# EAGLE board receiver (EAGLE 9.6.1)
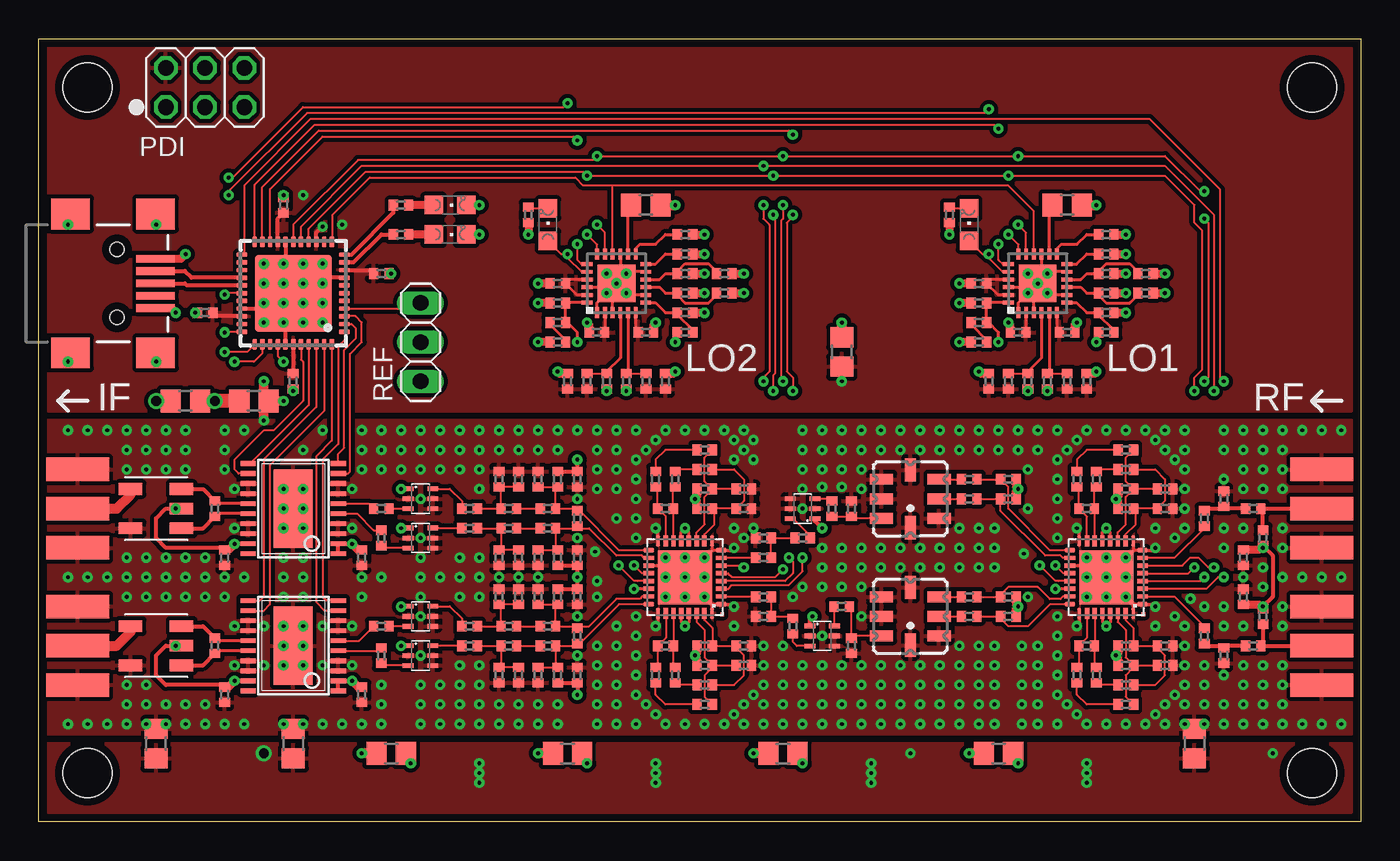
[diagram p0: board, top side]
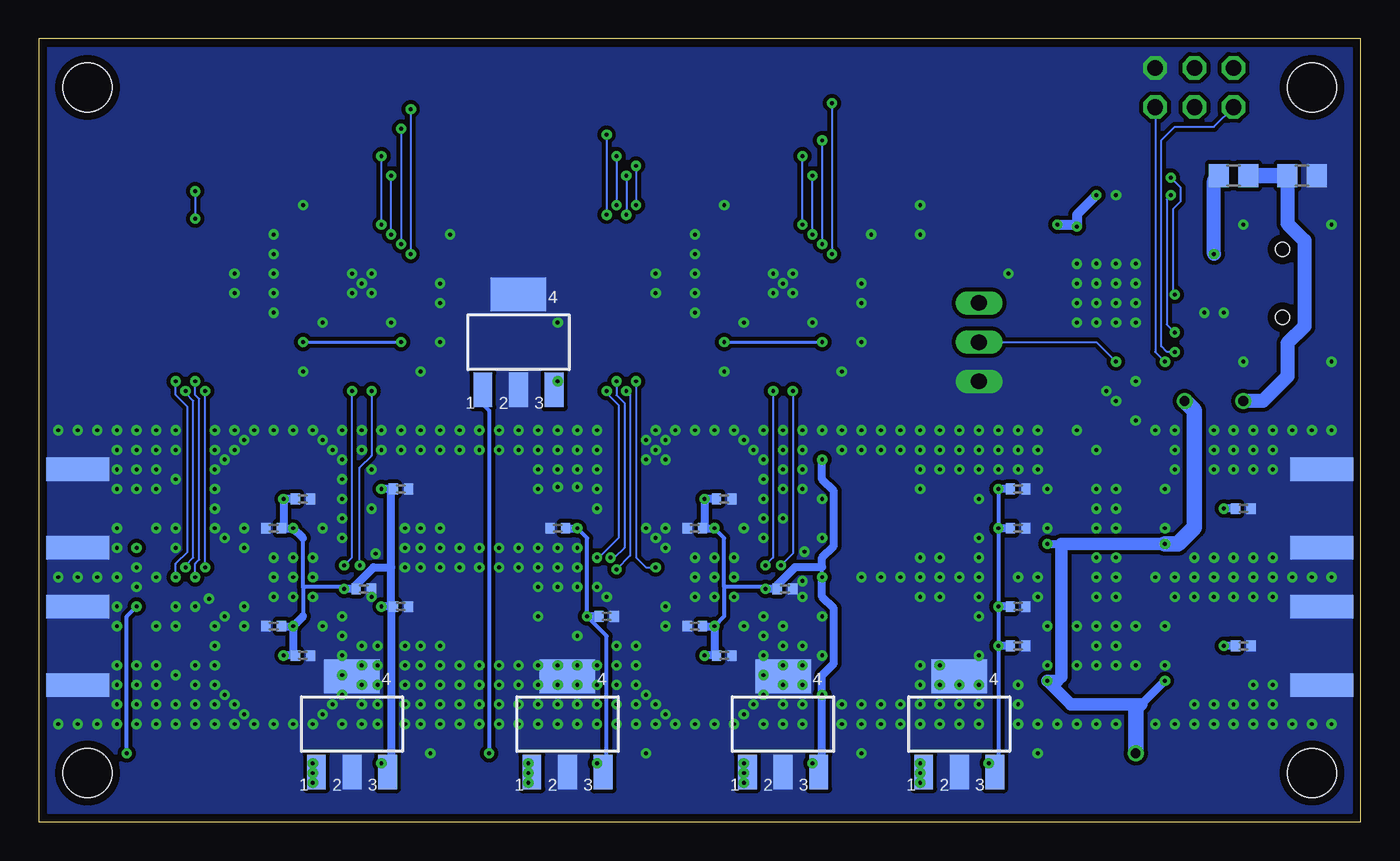
[diagram p1: board, bottom side, seen from below]

Size 85.72 x 50.8 mm. Coordinates in mm from the lower left corner, seen from the top.
Outline: 0,0 0,50.8 85.72,50.8 85.72,0 0,0
Copper layers (1*16): Top 0.035mm / dielectric 0.5mm / Bottom 0.035mm
Design rules "33each *": minimum track width 5mil, minimum drill 10mil, track to track 5mil, track to pad 5mil, pad to pad 5mil, via to via 5mil, smd to smd 5mil, copper to edge 20mil, drill to drill 8mil, minimum pad ring 10mil, minimum via ring 8mil, stop-mask expansion 4mil, vias tented up to drill 0mil, thermal gap 10mil
Holes 3.17 mm at 3.17,3.17 3.17,47.62 82.55,47.62 82.55,3.17

## Footprints (pad centres in the part's own frame; a part is rotated, then mirrored left to right if it is on the bottom)
R0402 = smd 0.6 x 0.7: 1 -0.5,0; 2 0.5,0
CHIPLED_0805 = smd 1.2 x 1.2: A 0,-1.05; C 0,1.05
R0805 = smd 1.3 x 1.5: 1 -0.95,0; 2 0.95,0
SOT363-INFINION = smd 0.3 x 0.7: 1 -0.65,-0.8; 2 0,-0.8; 3 0.65,-0.8; 4 0.65,0.8; 5 0,0.8; 6 -0.65,0.8
SOT223 = smd 1.219 x 2.235: 1 -2.311,-3.099; 2 0,-3.099; 3 2.311,-3.099 | smd 3.6 x 2.2: 4 0,3.099
TSSOP20 = smd 0.305 x 0.991: 1 -2.925,-2.918; 2 -2.275,-2.918; 3 -1.625,-2.918; 4 -0.975,-2.918; 5 -0.325,-2.918; 6 0.325,-2.918; 7 0.975,-2.918; 8 1.625,-2.918; 9 2.275,-2.918; 10 2.925,-2.918; 11 2.925,2.918; 12 2.275,2.918; 13 1.625,2.918; 14 0.975,2.918; 15 0.325,2.918; 16 -0.325,2.918; 17 -0.975,2.918; 18 -1.625,2.918; 19 -2.275,2.918; 20 -2.925,2.918
USB-MINIB = smd 2.5 x 0.5: D+ 2.5,0; D- 2.5,0.8; GND 2.5,-1.6; ID 2.5,-0.8; VBUS 2.5,1.6 | smd 2.5 x 2: S1 -3,4.5; S2 2.5,4.5; S3 -3,-4.5; S4 2.5,-4.5 | hole 0.9: 0,2.2; 0,-2.2
SMA-EDGE = smd 1.524 x 4.064: GND@0 0,0; GND@1 5.08,0; SIG 2.54,0 | smd 1.524 x 4.064 bottom: GND@2 0,0; GND@3 5.08,0
2X03 = drill 1.016 octagon: 1 -2.54,-1.27; 2 -2.54,1.27; 3 0,-1.27; 4 0,1.27; 5 2.54,-1.27; 6 2.54,1.27
1X03 = drill 1.016 long: 1 -2.54,0; 2 0,0; 3 2.54,0
RF_BALUN_2.54 = smd 0.762 x 1.524: 1 1.27,-1.651; 2 0,-1.651; 3 -1.27,-1.651; 4 -1.27,1.651; 6 1.27,1.651
HVQFN32 = smd 0.7 x 0.28: 1 -2.35,1.75; 2 -2.35,1.25; 3 -2.35,0.75; 4 -2.35,0.25; 5 -2.35,-0.25; 6 -2.35,-0.75; 7 -2.35,-1.25; 8 -2.35,-1.75; 17 2.35,-1.75; 18 2.35,-1.25; 19 2.35,-0.75; 20 2.35,-0.25; 21 2.35,0.25; 22 2.35,0.75; 23 2.35,1.25; 24 2.35,1.75 | smd 0.28 x 0.7: 9 -1.75,-2.35; 10 -1.25,-2.35; 11 -0.75,-2.35; 12 -0.25,-2.35; 13 0.25,-2.35; 14 0.75,-2.35; 15 1.25,-2.35; 16 1.75,-2.35; 25 1.75,2.35; 26 1.25,2.35; 27 0.75,2.35; 28 0.25,2.35; 29 -0.25,2.35; 30 -0.75,2.35; 31 -1.25,2.35; 32 -1.75,2.35 | smd 3.5 x 3.5: EXP 0,0 | smd 0.25 x 0.25: M1 -2.415,2.415
LCC8 = smd 1.5 x 0.7: 1 -1.867,1.27; 2 -1.867,0; 3 -1.867,-1.27; 5 1.867,-1.27; 6 1.867,0; 7 1.867,1.27 | smd 0.7 x 1.5: 4 0,-1.867; 8 0,1.867
SMD2,54-5,08 = smd 2.54 x 5.08: 1 0,0
QFN24-4X4 = smd 0.7 x 0.25: 1 -1.9,1.25; 2 -1.9,0.75; 3 -1.9,0.25; 4 -1.9,-0.25; 5 -1.9,-0.75; 6 -1.9,-1.25; 13 1.9,-1.25; 14 1.9,-0.75; 15 1.9,-0.25; 16 1.9,0.25; 17 1.9,0.75; 18 1.9,1.25 | smd 0.25 x 0.7: 7 -1.25,-1.9; 8 -0.75,-1.9; 9 -0.25,-1.9; 10 0.25,-1.9; 11 0.75,-1.9; 12 1.25,-1.9; 19 1.25,1.9; 20 0.75,1.9; 21 0.25,1.9; 22 -0.25,1.9; 23 -0.75,1.9; 24 -1.25,1.9 | smd 2.45 x 2.45: EXP 0,0
MLF44-TH = smd 0.7 x 0.3: 1 -3.325,2.5; 2 -3.325,2; 3 -3.325,1.5; 4 -3.325,1; 5 -3.325,0.5; 6 -3.325,0; 7 -3.325,-0.5; 8 -3.325,-1; 9 -3.325,-1.5; 10 -3.325,-2; 11 -3.325,-2.5; 23 3.325,-2.5; 24 3.325,-2; 25 3.325,-1.5; 26 3.325,-1; 27 3.325,-0.5; 28 3.325,0; 29 3.325,0.5; 30 3.325,1; 31 3.325,1.5; 32 3.325,2; 33 3.325,2.5 | smd 0.3 x 0.7: 12 -2.5,-3.325; 13 -2,-3.325; 14 -1.5,-3.325; 15 -1,-3.325; 16 -0.5,-3.325; 17 0,-3.325; 18 0.5,-3.325; 19 1,-3.325; 20 1.5,-3.325; 21 2,-3.325; 22 2.5,-3.325; 34 2.5,3.325; 35 2,3.325; 36 1.5,3.325; 37 1,3.325; 38 0.5,3.325; 39 0,3.325; 40 -0.5,3.325; 41 -1,3.325; 42 -1.5,3.325; 43 -2,3.325; 44 -2.5,3.325 | smd 5 x 5: TH 0,0

## Placement (x,y rotation side)
C1  3p  [R0402]  75.56,19.68 270 top
C2  3p  [R0402]  75.56,12.06 270 top
C3  [R0402]  70.48,11.43 0 top
C4  [R0402]  70.48,10.16 0 top
C5  [R0402]  70.48,20.32 0 top
C6  [R0402]  70.48,21.59 0 top
C7  [R0402]  73.03,21.59 0 top
C8  [R0402]  73.03,20.32 0 top
C9  [R0402]  73.03,11.43 0 top
C10  [R0402]  73.03,10.16 0 top
C11  [R0402]  67.94,11.43 0 top
C12  [R0402]  67.31,9.53 90 top
C13  [R0402]  68.58,9.53 90 top
C14  [R0402]  70.48,8.89 180 top
C15  [R0402]  70.48,7.62 180 top
C16  [R0402]  70.48,12.7 180 bottom
C17  [R0402]  68.58,10.79 0 bottom
C18  [R0402]  70.48,19.05 180 bottom
C19  [R0402]  68.58,20.95 0 bottom
C20  [R0402]  70.48,22.86 0 top
C21  [R0402]  70.48,24.13 0 top
C22  [R0402]  67.94,20.32 0 top
C23  [R0402]  67.31,22.23 90 top
C24  [R0402]  68.58,22.23 90 top
C25  [R0402]  64.64,15.11 0 bottom
C26  [R0402]  31.75,39.37 270 top
C27  [R0402]  59.05,39.37 270 top
C30  470p  [R0402]  60.33,20.95 180 top
C33  470p  [R0402]  60.33,22.23 180 top
C38  470p  [R0402]  60.33,14.61 0 top
C40  470p  [R0402]  60.33,13.34 0 top
C42  10n  [R0402]  62.23,13.97 0 bottom
C43  10n  [R0402]  62.23,21.59 0 bottom
C44  7p  [R0402]  51.44,20.32 90 top
C45  10n  [R0402]  49.53,18.41 180 top
C46  18p  [R0402]  46.99,17.14 180 top
C47  18p  [R0402]  46.99,14.61 0 top
C48  [R0402]  43.18,11.43 0 top
C49  [R0402]  43.18,10.16 0 top
C50  [R0402]  43.18,20.32 0 top
C51  [R0402]  43.18,21.59 0 top
C52  [R0402]  45.72,21.59 0 top
C53  [R0402]  45.72,20.32 0 top
C54  [R0402]  45.72,11.43 0 top
C55  [R0402]  45.72,10.16 0 top
C56  [R0402]  40.64,11.43 0 top
C57  [R0402]  40.01,9.53 90 top
C58  [R0402]  41.27,9.53 90 top
C59  [R0402]  43.18,8.89 180 top
C60  [R0402]  43.18,7.62 180 top
C61  [R0402]  43.18,12.7 180 bottom
C62  [R0402]  41.27,10.79 0 bottom
C63  [R0402]  43.18,19.05 180 bottom
C64  [R0402]  41.27,20.95 0 bottom
C65  [R0402]  43.18,22.86 0 top
C66  [R0402]  43.18,24.13 0 top
C67  [R0402]  40.64,20.32 0 top
C68  [R0402]  40.01,22.23 90 top
C69  [R0402]  41.27,22.23 90 top
C70  [R0402]  37.34,15.11 0 bottom
C71  100n  [R0402]  15.88,40.01 90 top
C72  100n  [R0402]  10.79,33.02 180 top
C73  100n  [R0402]  22.23,20.32 180 top
C74  100n  [R0402]  22.23,18.41 90 top
C75  100n  [R0402]  22.23,35.56 0 top
C76  100n  [R0402]  16.51,28.57 270 top
C77  10n  [R0402]  64.14,28.57 90 top
C78  10n  [R0402]  65.41,28.57 90 top
C79  22n  [R0402]  62.87,28.57 90 top
C80  22n  [R0402]  66.67,28.57 90 top
C81  10n  [R0402]  61.59,28.57 90 top
C82  10n  [R0402]  67.94,28.57 90 top
C83  10n  [R0402]  36.83,28.57 90 top
C84  10n  [R0402]  38.1,28.57 90 top
C85  22n  [R0402]  35.56,28.57 90 top
C86  22n  [R0402]  39.37,28.57 90 top
C87  10n  [R0402]  34.29,28.57 90 top
C88  10n  [R0402]  40.64,28.57 90 top
C89  100n  [R0402]  22.23,12.7 180 top
C90  100n  [R0402]  22.23,10.79 90 top
C91  [R0402]  29.84,17.14 90 top
C92  [R0402]  31.11,17.14 90 top
C93  [R0402]  30.48,19.05 180 top
C94  [R0402]  33.02,19.05 180 top
C95  [R0402]  32.38,17.14 90 top
C96  [R0402]  33.66,17.14 90 top
C97  [R0402]  30.48,20.32 180 top
C98  [R0402]  33.02,20.32 180 top
C99  [R0402]  29.84,22.23 90 top
C100  [R0402]  31.11,22.23 90 top
C101  [R0402]  32.38,22.23 90 top
C102  [R0402]  33.66,22.23 90 top
C103  100n  [R0402]  27.94,20.32 180 top
C104  100n  [R0402]  27.94,19.05 180 top
C105  [R0402]  29.84,9.53 90 top
C106  [R0402]  31.11,9.53 90 top
C107  [R0402]  30.48,11.43 180 top
C108  [R0402]  33.02,11.43 180 top
C109  [R0402]  32.38,9.53 90 top
C110  [R0402]  33.66,9.53 90 top
C111  [R0402]  30.48,12.7 180 top
C112  [R0402]  33.02,12.7 180 top
C113  [R0402]  29.84,14.61 90 top
C114  [R0402]  31.11,14.61 90 top
C115  [R0402]  32.38,14.61 90 top
C116  [R0402]  33.66,14.61 90 top
C117  100n  [R0402]  27.94,12.7 180 top
C118  100n  [R0402]  27.94,11.43 180 top
C119  [R0402]  34.92,17.14 90 top
C120  [R0402]  34.92,14.61 90 top
C121  [R0402]  34.92,9.53 90 top
C122  [R0402]  34.92,22.23 90 top
C123  100n  [R0402]  22.23,21.59 180 bottom
C124  100n  [R0402]  22.23,19.05 180 bottom
C125  100n  [R0402]  22.23,13.97 180 bottom
C126  100n  [R0402]  22.23,11.43 180 bottom
C127  7p  [R0402]  52.07,13.97 0 top
C128  10n  [R0402]  78.74,11.43 0 top
C129  100n  [R0402]  20.95,8.26 90 top
C130  100n  [R0402]  12.06,8.26 90 top
C131  100n  [R0402]  12.06,17.14 90 top
C132  1--n  [R0402]  20.95,17.14 90 top
C133  [R0402]  41.91,35.56 180 top
C134  [R0402]  41.91,34.29 180 top
C135  [R0402]  41.91,33.02 180 top
C136  [R0402]  41.91,36.83 180 top
C137  [R0402]  44.45,35.56 180 top
C138  [R0402]  44.45,34.29 180 top
C139  [R0402]  39.37,31.75 180 top
C140  [R0402]  36.2,31.75 180 top
C141  [R0402]  33.66,34.92 180 top
C142  [R0402]  41.91,31.75 180 top
C143  [R0402]  33.66,33.66 180 top
C144  [R0402]  33.66,32.38 180 top
C145  [R0402]  33.66,31.11 180 top
C146  [R0402]  69.22,35.56 180 top
C147  [R0402]  41.91,38.1 180 top
C148  [R0402]  69.22,34.29 180 top
C149  [R0402]  69.22,33.02 180 top
C150  [R0402]  69.22,36.83 180 top
C151  [R0402]  71.75,35.56 180 top
C152  [R0402]  71.75,34.29 180 top
C153  [R0402]  66.67,31.75 180 top
C154  [R0402]  63.5,31.75 180 top
C155  [R0402]  60.96,34.92 180 top
C156  [R0402]  69.22,31.75 180 top
C157  [R0402]  60.96,33.66 180 top
C158  [R0402]  60.96,32.38 180 top
C159  [R0402]  60.96,31.11 180 top
C160  [R0402]  69.22,38.1 180 top
C161  10n  [R0402]  78.74,20.32 0 top
C162  10n  [R0402]  78.11,14.61 270 top
C163  100n  [R0402]  7.62,20.32 0 bottom
C164  100n  [R0402]  7.62,11.43 0 bottom
C165  10n  [R0402]  78.11,17.14 270 top
D1  [CHIPLED_0805]  26.67,40.01 270 top
D2  [CHIPLED_0805]  26.67,38.1 270 top
E$1  1u  [R0805]  13.97,27.3 0 top
E$2  1u  [R0805]  9.53,27.3 180 top
E$3  1u  [R0805]  8.26,41.91 0 bottom
E$4  1u  [R0805]  3.81,41.91 180 bottom
E$5  [SOT363-INFINION]  50.8,12.06 270 top
E$6  [SOT363-INFINION]  49.53,20.32 90 top
E$7  [SOT223]  51.44,6.35 0 bottom
E$8  1u  [R0805]  48.26,4.45 180 top
E$9  [SOT363-INFINION]  24.77,20.95 270 top
E$10  [SOT363-INFINION]  24.77,18.41 270 top
E$11  [SOT363-INFINION]  24.77,13.34 270 top
E$12  [SOT363-INFINION]  24.77,10.79 270 top
E$13  [TSSOP20]  16.51,20.32 90 top
E$14  [TSSOP20]  16.51,11.43 90 top
E$19  [SOT223]  26.04,6.35 0 bottom
E$20  [SOT223]  37.47,6.35 0 bottom
E$23  1u  [R0805]  34.29,4.45 180 top
E$24  1u  [R0805]  22.86,4.45 180 top
E$25  1u  [R0805]  16.51,5.08 90 top
E$26  [SOT223]  65.41,6.35 0 bottom
E$27  1u  [R0805]  62.23,4.45 180 top
E$36  [R0805]  39.37,40.01 0 top
E$37  [R0805]  66.67,40.01 0 top
E$43  [SOT223]  54.61,31.11 0 bottom
E$44  1u  [R0805]  52.07,30.48 90 top
E$47  [CHIPLED_0805]  33.02,38.73 0 top
E$48  [CHIPLED_0805]  60.33,38.73 0 top
E$49  1u  [R0805]  7.62,5.08 90 top
E$50  1u  [R0805]  74.93,5.08 90 top
J1  [USB-MINIB]  5.08,34.92 0 top
J2  [SMA-EDGE]  2.54,17.78 90 top
J3  [SMA-EDGE]  2.54,8.89 90 top
J5  [SMA-EDGE]  83.19,8.89 90 top
J6  [SMA-EDGE]  83.19,17.78 90 top
L1  7.5n  [R0402]  76.83,20.95 90 top
L2  7.5n  [R0402]  76.83,10.79 270 top
L3  11n  [R0402]  46.99,18.41 180 top
L4  11n  [R0402]  46.99,13.34 180 top
L5  12n  [R0402]  52.7,11.43 270 top
L6  10n  [R0402]  48.9,12.7 90 top
L7  12n  [R0402]  52.7,20.32 90 top
L8  22n  [R0402]  79.38,18.41 270 top
L9  [R0402]  52.07,19.05 0 bottom
L10  [R0402]  48.9,13.34 180 bottom
L11  22n  [R0402]  79.38,13.34 270 top
L12  13n  [R0402]  62.87,14.61 0 top
L13  13n  [R0402]  62.87,13.34 0 top
L14  13n  [R0402]  62.87,20.95 0 top
L15  13n  [R0402]  62.87,22.23 0 top
PDI  [2X03]  10.79,47.62 0 top
R1  330  [R0402]  23.5,40.01 180 top
R2  330  [R0402]  23.5,38.1 180 top
R3  [R0402]  11.43,20.32 270 top
R4  [R0402]  11.43,11.43 270 top
R5  100  [R0402]  34.92,19.68 90 top
R6  100  [R0402]  34.92,12.06 90 top
REF  [1X03]  24.77,31.11 90 top
T1  [RF_BALUN_2.54]  7.62,20.32 90 top
T2  [RF_BALUN_2.54]  7.62,11.43 90 top
U1  LTC5566  [HVQFN32]  69.22,15.88 180 top
U2  AFS374E  [LCC8]  56.52,20.95 180 top
U3  AFS374E  [LCC8]  56.52,13.34 180 top
U4  LTC5566  [HVQFN32]  41.91,15.88 180 top
U5  [SMD2,54-5,08]  16.51,20.32 0 top
U6  [SMD2,54-5,08]  16.51,11.43 0 top
U7  [QFN24-4X4]  64.77,34.92 90 top
U8  [QFN24-4X4]  37.47,34.92 90 top
U9  [MLF44-TH]  16.51,34.29 180 top

## Library data of the parts
C1-C27 C30 C33 C38 C40 C42-C165 E$1-E$4 E$8 E$23-E$25 E$27 E$36 E$37 E$44 E$49 E$50 L1-L15 R1-R6 = rcl
D1 D2 E$47 E$48 = led
E$5 E$6 E$9-E$12 = transistor
E$7 E$19 E$20 E$26 E$43 = transistor-fet
E$13 E$14 U1 U4 = ref-packages
J1 = SparkFun-Connectors
J2 J3 J5 J6 = SparkFun-Retired
PDI REF = pinhead
T1 T2 = misc
U2 U3 = analog-devices
U5 U6 = wirepad
U7 U8 = linear-technology
U9 = atmel

## Nets
!RESET: PDI.5 U9.35
CLK: REF.2 U9.37
CLK_100K: U7.16 U8.16 U9.12
CS0: U8.19 U9.20
CS1: U4.3 U9.21
CS2: U7.19 U9.22
CS3: U1.3 U9.23
GND: C7.2 C8.2 C9.2 C10.2 C16.2 C17.2 C18.2 C19.2 C25.2 C26.2 C27.2 C42.2 C43.2 C52.2 C53.2 C54.2 C55.2 C61.2 C62.2 C63.2 C64.2 C70.2 C71.2 C72.2 C75.2 C76.2 C81.2 C82.2 C87.2 C88.2 C91.1 C92.1 C95.1 C99.2 C100.2 C101.2 C105.1 C106.1 C109.1 C113.2 C114.2 C115.2 C119.2 C120.1 C121.2 C122.1 C123.1 C124.1 C125.1 C126.1 C129.1 C130.1 C131.1 C132.1 C133.1 C134.1 C135.1 C136.1 C137.1 C138.1 C139.1 C140.2 C141.2 C143.2 C145.2 C146.1 C147.1 C148.1 C149.1 C150.1 C151.1 C152.1 C153.1 C154.2 C155.2 C157.2 C159.2 C160.1 C162.1 C163.2 C164.2 C165.2 D1.C D2.C E$1.2 E$4.1 E$5.2 E$5.4 E$5.5 E$6.2 E$6.4 E$6.5 E$7.2 E$7.4 E$8.2 E$9.2 E$9.4 E$9.5 E$10.2 E$10.4 E$10.5 E$11.2 E$11.4 E$11.5 E$12.2 E$12.4 E$12.5 E$13.3 E$13.4 E$13.7 E$13.8 E$13.13 E$13.14 E$13.17 E$13.18 E$14.3 E$14.4 E$14.7 E$14.8 E$14.13 E$14.14 E$14.17 E$14.18 E$19.2 E$19.4 E$20.2 E$20.4 E$23.2 E$24.2 E$25.2 E$26.2 E$26.4 E$27.2 E$36.2 E$37.2 E$43.2 E$43.4 E$44.2 E$49.2 E$50.2 J1.GND J1.S1 J1.S2 J1.S3 J1.S4 J2.GND@0 J2.GND@1 J2.GND@2 J2.GND@3 J3.GND@0 J3.GND@1 J3.GND@2 J3.GND@3 J5.GND@0 J5.GND@1 J5.GND@2 J5.GND@3 J6.GND@0 J6.GND@1 J6.GND@2 J6.GND@3 L1.2 L2.2 L3.2 L4.2 L5.2 L7.2 L9.1 L10.1 PDI.6 REF.1 T1.4 T2.4 U1.1 U1.8 U1.9 U1.16 U1.19 U1.25 U1.32 U1.EXP U2.1 U2.4 U2.5 U2.6 U2.8 U3.1 U3.4 U3.5 U3.6 U3.8 U4.1 U4.8 U4.9 U4.16 U4.19 U4.25 U4.32 U4.EXP U5.1 U6.1 U7.1 U7.3 U7.8 U7.11 U7.15 U7.22 U7.EXP U8.1 U8.3 U8.8 U8.11 U8.15 U8.22 U8.EXP U9.8 U9.18 U9.30 U9.38 U9.TH
IF1: J2.SIG T1.6
IF2: J3.SIG T2.6
LOCK0: E$47.A U8.20 U9.28
LOCK1: E$48.A U7.20 U9.33
PDI: PDI.1 U9.34
PPS: REF.3 U9.4
RF1: C161.2 J6.SIG L8.1
RF2: C128.2 J5.SIG L11.2
S$1: J1.D- U9.26
S$2: J1.D+ U9.27
S$3: C2.1 U1.2
S$4: C1.2 U1.7
S$5: C13.1 C14.2
S$6: C11.2 C13.2 U1.27
S$7: C6.2 C7.1 C21.2 U1.11
S$8: C5.2 C8.1 C20.2 U1.10
S$9: C4.2 C10.1 C15.1 U1.30
S$10: C3.2 C9.1 C14.1 U1.31
S$11: C11.1 C12.2 U1.26
S$12: C12.1 C15.2
S$13: C20.1 C24.2
S$14: C21.1 C23.2
S$15: C22.1 C23.1 U1.15
S$16: C22.2 C24.1 U1.14
S$17: C30.1 L14.1 U1.18
S$18: C38.1 U3.3
S$19: C77.2 C79.2 U7.4
S$21: C40.2 L13.1 U1.24
S$22: C38.2 L12.1 U1.23
S$25: C33.1 L15.1 U1.17
S$26: C78.2 C80.2 U7.5
S$27: R1.2 U9.11
S$28: R2.2 U9.10
S$29: C47.2 L4.1 L6.2
S$30: C45.2 C46.1 L3.1
S$31: C47.1 U4.2
S$32: C46.2 U4.7
S$33: C51.2 C52.1 C66.2 U4.11
S$34: C50.2 C53.1 C65.2 U4.10
S$35: C49.2 C55.1 C60.1 U4.30
S$36: C48.2 C54.1 C59.1 U4.31
S$37: C58.1 C59.2
S$38: C56.2 C58.2 U4.27
S$39: C56.1 C57.2 U4.26
S$40: C57.1 C60.2
S$41: C65.1 C69.2
S$42: C66.1 C68.2
S$43: C67.1 C68.1 U4.15
S$44: C67.2 C69.1 U4.14
S$45: C98.1 C101.1 C102.1 R5.2 U4.17
S$46: C94.1 C95.2 C96.2 R5.1 U4.18
S$47: C108.1 C109.2 C110.2 R6.1 U4.24
S$48: C112.1 C115.1 C116.1 R6.2 U4.23
S$50: C127.1 E$5.6
S$51: C73.2 E$13.6
S$52: C44.1 L7.1 U2.7
S$53: C127.2 L5.1 U3.7
S$54: C78.1 U1.20
S$55: C77.1 U1.21
S$56: C44.2 E$6.3
S$57: C133.2 C137.2 U8.10
S$58: C84.1 U4.20
S$59: C83.1 U4.21
S$60: C83.2 C85.2 U8.4
S$61: C84.2 C86.2 U8.5
S$62: C74.2 E$13.5
S$63: C73.1 E$9.3
S$64: C74.1 E$10.3
S$65: C89.1 E$11.3
S$66: C90.1 E$12.3
S$67: C89.2 E$14.6
S$68: C90.2 E$14.5
S$69: E$13.10 U9.2
S$70: C93.1 C94.2
S$71: C91.2 C92.2 C93.2 C104.1
S$72: C103.2 E$9.6
S$73: C97.1 C98.2
S$74: C97.2 C99.1 C100.1 C103.1
S$75: C104.2 E$10.6
S$76: C107.1 C108.2
S$77: C105.2 C106.2 C107.2 C118.1
S$78: C117.2 E$11.6
S$79: C111.1 C112.2
S$80: C111.2 C113.1 C114.1 C117.1
S$81: C118.2 E$12.6
S$82: E$13.9 U9.3
S$83: E$14.10 U9.1
S$84: E$14.9 U9.44
S$85: E$14.12 U9.43
S$86: E$14.11 U9.42
S$89: C134.2 C138.2 U8.9
S$90: C136.2 U8.12
S$91: C135.2 C142.1 U8.7
S$92: C142.2 C143.1 C144.1 U8.24
S$93: C144.2 C145.1
S$94: C147.2 U8.13
S$95: E$36.1 U8.14
S$96: E$5.3 L6.1
S$97: C45.1 E$6.6
S$98: C146.2 C151.2 U7.10
S$99: C148.2 C152.2 U7.9
S$100: C150.2 U7.12
S$101: C149.2 C156.1 U7.7
S$102: C156.2 C157.1 C158.1 U7.24
S$103: C158.2 C159.1
S$104: C160.2 U7.13
S$105: E$37.1 U7.14
S$106: D1.A R1.1
S$107: C26.1 E$47.C
S$108: C27.1 E$48.C
S$109: D2.A R2.1
S$110: E$13.12 U9.40
S$111: E$13.16 R3.2 T1.3
S$112: E$13.15 R3.1 T1.1
S$113: E$14.15 R4.1 T2.1
S$114: E$14.16 R4.2 T2.3
S$115: E$13.11 U9.41
S$116: C1.1 C161.1 L1.1
S$117: C2.2 C128.1 L2.1
S$121: C40.1 U3.2
S$122: C30.2 U2.2
S$123: C33.2 U2.3
SPI_CLK: U1.4 U4.4 U7.17 U8.17 U9.17
SPI_SDI: U1.5 U4.5 U7.18 U8.18 U9.15
SPI_SDO: U1.6 U4.6 U9.16
V2.5_1: C123.2 C124.2 C125.2 C126.2 E$9.1 E$10.1 E$11.1 E$12.1 E$19.3 E$24.1
V2.5_2: E$5.1 E$6.1 E$7.3 E$8.1 L9.2 L10.2
V3.3: C71.1 C72.1 C75.1 C76.1 C79.1 C80.1 C81.1 C82.1 C85.1 C86.1 C87.1 C88.1 C139.2 C140.1 C141.1 C153.2 C154.1 C155.1 E$43.3 E$44.1 PDI.2 U7.2 U7.6 U7.21 U7.23 U8.2 U8.6 U8.21 U8.23 U9.9 U9.14 U9.19 U9.31 U9.39
V3.3_1: C48.1 C49.1 C50.1 C51.1 C61.1 C62.1 C63.1 C64.1 C70.1 C96.1 C102.2 C110.1 C116.2 C119.1 C120.2 C121.1 C122.2 E$20.3 E$23.1 U4.12 U4.13 U4.22 U4.28 U4.29
V3.3_2: C3.1 C4.1 C5.1 C6.1 C16.1 C17.1 C18.1 C19.1 C25.1 C42.1 C43.1 E$26.3 E$27.1 L12.2 L13.2 L14.2 L15.2 U1.12 U1.13 U1.22 U1.28 U1.29
V5: C129.2 C130.2 C131.2 C132.2 C162.2 C163.1 C164.1 C165.1 E$1.1 E$2.1 E$7.1 E$13.1 E$13.2 E$13.19 E$14.1 E$14.2 E$14.19 E$19.1 E$20.1 E$25.1 E$26.1 E$43.1 E$49.1 E$50.1 L8.2 L11.1 T1.2 T2.2
VBUS: E$3.1 J1.VBUS
VIN: E$2.2 E$3.2 E$4.2

## Tracks (layer width: path | path; a pad name or v marks a point on that pad's centre or on a via)
!RESET  (via drill 0.25)
  Top 0.127: U9.35 14.51,30.39 13.97,29.84 v12.7,29.84
  Bottom 0.127: v12.7,29.84 13.34,30.48 PDI.5
CLK  (via drill 0.25)
  Top 0.127: U9.37 15.51,30.21 v15.88,29.84
  Bottom 0.127: v15.88,29.84 17.14,31.11 REF.2
CLK_100K
  Top 0.127: U8.16 37.22,41.27 37.21,41.27 | U7.16 64.52,39.62 62.87,41.27 37.21,41.27 | 37.21,41.27 35.31,41.27 34.8,41.78 21.46,41.78 19.05,39.37 19.05,37.66 U9.12
CS0  (via drill 0.25)
  Top 0.127: v34.92,44.2 34.67,44.45 18.41,44.45 15.01,41.05 U9.20 | U8.19 35.2,36.17 34.92,36.45 v34.92,37.47
  Bottom 0.127: v34.92,44.2 v34.92,37.47
CS1  (via drill 0.25)
  Top 0.127: v48.9,44.58 48.64,44.83 18.16,44.83 14.51,41.18 U9.21 | U4.3 44.72,15.12 44.96,15.37 48.64,15.37 49.53,16.26 v49.53,17.14 | v48.9,39.37 48.9,39.24 48.51,38.86 48.51,29.21 48.9,28.83 v48.9,27.94
  Bottom 0.127: v48.9,27.94 48.9,27.81 48.13,27.05 48.13,18.41 49.4,17.14 v49.53,17.14 | v48.9,44.58 v48.9,39.37
CS2  (via drill 0.25)
  Top 0.127: U7.19 62.5,36.17 62.23,36.45 v62.23,37.47 | v62.23,44.96 61.98,45.21 17.91,45.21 14.01,41.31 U9.22
  Bottom 0.127: v62.23,44.96 v62.23,37.47
CS3  (via drill 0.25)
  Top 0.127: v76.83,15.88 76.45,15.88 75.7,15.12 U1.3 | v76.83,28.57 76.58,28.83 76.58,41.02 72.01,45.59 17.65,45.59 13.34,41.27 13.34,36.94 U9.23
  Bottom 0.127: v76.83,15.88 76.83,16.76 76.07,17.53 76.07,26.92 76.83,27.69 v76.83,28.57
GND  (via drill 0.25)
  Top 0.203: v72.39,17.78 72.23,17.62 U1.8 70.97,17.62 | v72.39,13.97 72.23,14.12 U1.1 70.97,14.12 | U1.9 70.97,17.62 | 70.97,17.62 v70.48,17.14 | U1.32 70.97,14.12 | 70.97,14.12 v70.48,14.61 | U1.19 67.83,16.62 67.94,16.51 v67.94,15.88 | U1.16 67.47,18.89 v67.31,19.05 | U1.25 67.47,12.86 v67.31,12.7 | v45.09,17.78 44.93,17.62 U4.8 43.66,17.62 | v45.09,13.97 44.93,14.12 U4.1 43.66,14.12 | U4.9 43.66,17.62 | 43.66,17.62 v43.18,17.14 | U4.32 43.66,14.12 | 43.66,14.12 v43.18,14.61 | U4.19 40.52,16.62 40.64,16.51 v40.64,15.88 | U4.16 40.16,18.89 v40.01,19.05 | U4.25 40.16,12.86 v40.01,12.7 | U8.22 36.45,34.67 v36.83,34.29 | U8.3 37.22,33.91 v36.83,34.29 | U8.8 38.22,34.17 v38.1,34.29 | U8.11 38.22,35.67 v38.1,35.56 37.72,35.95 U8.15 | U8.1 36.22,33.67 v36.83,34.29 | U7.22 63.75,34.67 v64.14,34.29 | U7.3 64.52,33.91 v64.14,34.29 | U7.8 65.52,34.17 v65.41,34.29 | U7.11 65.52,35.67 v65.41,35.56 65.02,35.95 U7.15 | U7.1 63.52,33.67 v64.14,34.29
  Top 0.254: U9.8 18.78,35.29 v18.41,34.92 | U9.38 16.01,32.25 v15.88,32.38 | U9.30 14.24,33.29 v14.61,33.66 | U9.18 16.01,36.33 v15.88,36.2 | U9.TH v15.88,34.92
  Top 0.508: C71.2 v15.88,40.64 | C75.2 v22.86,35.56 | C76.2 v16.51,27.94 | C72.2 v10.16,33.02 | C133.1 v43.18,35.56 | C134.1 v43.18,34.29 | C136.1 v43.18,36.83 | C135.1 v43.18,33.02 | C138.1 v45.72,34.29 | C137.1 v45.72,35.56 | C145.2 v32.38,31.11 | C143.2 v32.38,33.66 | C141.2 v32.38,34.92 | C139.1 39.87,32.25 v40.01,32.38 | C140.2 35.7,32.25 v35.56,32.38 | C147.1 v43.18,38.1 | C146.1 v70.48,35.56 | C148.1 v70.48,34.29 | C150.1 v70.48,36.83 | C149.1 v70.48,33.02 | C152.1 v73.03,34.29 | C151.1 v73.03,35.56 | C159.2 v59.69,31.11 | C157.2 v59.69,33.66 | C155.2 v59.69,34.92 | C153.1 67.17,32.25 v67.31,32.38 | C154.2 63,32.25 v62.87,32.38 | C160.1 v70.48,38.1 | C87.2 33.79,29.07 v33.66,29.21 | C88.2 41.14,29.07 v41.27,29.21 | C81.2 61.09,29.07 v60.96,29.21 | C82.2 68.44,29.07 v68.58,29.21 | C26.2 v31.75,38.1 | C27.2 v59.05,38.1 | J1.GND 8.59,33.33 v8.89,33.02 | v28.57,40.01 D1.C | D2.C v28.57,38.1
  Top 0.61: J1.S3 2.08,30.02 v1.91,29.84 | E$1.2 14.61,27.62 v14.61,28.57 | E$1.2 14.61,26.99 v14.61,26.04 | E$1.2 v15.88,27.3
  Top 0.635: E$24.2 v20.95,4.45 | E$23.2 v32.38,4.45 | E$8.2 v46.35,4.45 | E$27.2 v60.33,4.45 | E$36.2 v41.27,40.01 | E$37.2 v68.58,40.01 | E$44.2 v52.07,32.38 | v1.91,38.73 1.91,39.25 J1.S1 | J1.S2 7.62,39.38 v7.62,38.73 | v7.62,29.84 7.58,29.89 J1.S4
  other vias: 76.83,9.53 73.66,18.41 74.3,19.05 74.3,20.32 74.3,21.59 76.83,12.7 80.64,13.97 80.64,8.89 80.64,22.86 73.66,13.34 74.3,12.7 74.3,11.43 74.3,10.16 75.56,10.16 72.39,19.05 72.39,12.7 67.94,17.14 69.22,17.14 70.48,15.88 69.22,15.88 67.94,14.61 69.22,14.61 74.3,8.89 73.66,8.26 73.03,7.62 71.75,6.35 70.48,6.35 72.39,6.99 69.22,6.35 67.94,6.35 67.31,6.99 66.67,7.62 66.04,8.26 66.04,9.53 66.04,10.79 66.04,12.06 73.03,6.35 74.3,6.35 75.56,6.35 76.83,6.35 80.64,6.35 81.92,6.35 83.19,6.35 74.3,22.86 73.66,23.5 73.03,24.13 72.39,24.77 71.75,25.4 70.48,25.4 69.22,25.4 67.94,25.4 67.31,24.77 66.67,24.13 66.04,23.5 66.04,22.23 66.04,20.95 66.04,19.68 73.03,25.4 74.3,25.4 80.64,25.4 81.92,25.4 83.19,25.4 66.04,18.41 66.04,13.34 64.77,11.43 54.61,24.13 54.61,17.78 54.61,10.16 54.61,16.51 55.88,17.78 57.15,17.78 57.15,16.51 55.88,16.51 53.34,17.78 53.34,16.51 55.88,24.13 55.88,25.4 54.61,25.4 57.15,25.4 57.15,24.13 58.42,24.13 58.42,25.4 59.69,25.4 60.96,25.4 62.23,25.4 62.23,24.13 60.96,24.13 59.69,24.13 53.34,25.4 53.34,24.13 52.07,25.4 52.07,24.13 66.04,25.4 66.04,6.35 64.77,6.35 60.96,6.35 59.69,6.35 52.07,6.35 52.07,7.62 52.07,8.89 52.07,10.16 53.34,10.16 53.34,8.89 53.34,7.62 53.34,6.35 54.61,8.89 54.61,7.62 54.61,6.35 55.88,10.16 55.88,8.89 55.88,7.62 55.88,6.35 57.15,10.16 57.15,8.89 57.15,7.62 57.15,6.35 58.42,10.16 59.69,10.16 60.96,10.16 64.77,7.62 64.77,8.89 64.77,10.16 58.42,6.35 58.42,7.62 58.42,8.89 59.69,8.89 59.69,7.62 60.96,8.89 60.96,7.62 64.77,24.13 64.77,25.4 74.3,7.62 75.56,7.62 75.56,8.89 76.83,7.62 74.3,24.13 49.53,8.89 46.99,11.43 46.99,10.16 45.09,19.05 45.09,12.7 40.64,17.14 41.91,17.14 43.18,15.88 41.91,15.88 40.64,14.61 41.91,14.61 46.99,8.89 46.35,8.26 45.72,7.62 44.45,6.35 43.18,6.35 45.09,6.99 41.91,6.35 40.64,6.35 40.01,6.99 39.37,7.62 38.73,8.26 38.73,9.53 38.73,10.79 38.73,12.06 45.72,6.35 46.99,6.35 48.26,6.35 49.53,6.35 46.35,23.5 45.72,24.13 45.09,24.77 44.45,25.4 43.18,25.4 41.91,25.4 40.64,25.4 40.01,24.77 39.37,24.13 38.73,23.5 38.73,22.23 38.73,20.95 38.73,19.68 45.72,25.4 49.53,25.4 38.73,18.41 38.73,13.34 37.47,11.43 37.47,19.68 38.73,25.4 38.73,6.35 37.47,6.35 37.47,7.62 37.47,8.89 37.47,10.16 37.47,21.59 37.47,22.86 37.47,24.13 37.47,25.4 46.99,7.62 48.26,7.62 48.26,8.89 49.53,7.62 50.8,10.16 50.8,8.89 50.8,7.62 49.53,10.16 50.8,25.4 45.72,18.41 50.8,6.35 81.92,15.88 83.19,15.88 84.45,15.88 29.84,15.88 31.11,15.88 32.38,15.88 29.84,24.13 31.11,24.13 32.38,24.13 29.84,7.62 31.11,7.62 32.38,7.62 34.92,10.79 34.92,13.34 34.92,18.41 34.92,20.95 36.2,14.61 36.2,8.89 36.2,7.62 36.2,6.35 37.47,12.7 36.2,25.4 36.2,24.13 36.2,22.86 36.2,21.59 24.77,20.95 24.77,18.41 24.77,13.34 24.77,10.79 20.32,12.7 20.32,10.16 12.7,12.7 12.7,10.16 20.32,21.59 20.32,19.05 12.7,19.05 12.7,21.59 15.88,20.32 15.88,21.59 17.14,21.59 17.14,20.32 17.14,19.05 15.88,19.05 15.88,12.7 17.14,12.7 15.88,11.43 15.88,10.16 17.14,10.16 17.14,11.43 33.66,25.4 33.66,24.13 32.38,25.4 31.11,25.4 29.84,25.4 28.57,25.4 27.3,25.4 33.66,7.62 33.66,6.35 32.38,6.35 31.11,6.35 29.84,6.35 28.57,6.35 27.3,6.35 26.04,6.35 24.77,6.35 24.77,8.89 26.04,8.89 27.3,8.89 27.3,10.16 28.57,10.16 28.57,8.89 24.77,7.62 26.04,7.62 27.3,7.62 28.57,7.62 26.04,25.4 24.77,25.4 24.77,22.86 26.04,22.86 27.3,22.86 28.57,22.86 28.57,21.59 28.57,24.13 27.3,24.13 26.04,24.13 24.77,24.13 28.57,15.88 28.57,14.61 27.3,14.61 27.3,15.88 27.3,17.14 28.57,17.14 26.04,15.88 24.77,15.88 24.77,14.61 24.77,17.14 14.61,12.7 14.61,10.16 18.41,12.7 18.41,10.16 12.06,15.88 20.95,15.88 12.06,6.35 20.95,6.35 34.92,25.4 36.2,10.16 36.2,11.43 63.5,25.4 63.5,24.13 23.5,25.4 23.5,24.13 23.5,22.86 36.07,17.53 36.2,15.62 61.98,10.16 61.98,8.89 61.98,7.62 61.98,6.35 63.75,10.16 63.75,8.89 63.75,7.62 63.75,6.35 18.41,32.38 17.14,32.38 14.61,32.38 18.41,33.66 18.41,36.2 17.14,36.2 17.14,34.92 17.14,33.66 15.88,33.66 14.61,36.2 14.61,34.92 15.88,15.88 15.88,17.14 17.14,17.14 17.14,15.88 17.14,14.61 15.88,14.61 36.83,35.56 37.47,34.92 64.14,35.56 64.77,34.92 46.35,24.77 45.09,23.5 74.68,14.48 75.56,13.97 76.83,13.97 76.83,17.78 76.83,19.05 76.83,22.23 76.83,25.4 76.83,24.13 22.23,6.35 19.68,6.35 18.41,6.35 17.14,6.35 15.88,6.35 13.34,6.35 10.79,6.35 9.53,6.35 9.53,7.62 8.26,7.62 6.99,7.62 5.71,7.62 5.71,6.35 4.45,6.35 3.17,6.35 1.91,6.35 22.23,25.4 20.95,25.4 22.23,24.13 22.23,22.86 20.95,24.13 20.95,22.86 6.99,6.35 8.26,6.35 10.79,7.62 22.23,7.62 22.23,8.89 3.17,25.4 4.45,25.4 5.71,25.4 6.99,25.4 8.26,25.4 9.53,25.4 12.06,25.4 12.06,24.13 9.53,24.13 8.26,24.13 6.99,24.13 5.71,24.13 22.23,15.88 20.95,14.61 13.34,15.88 12.06,14.61 10.79,14.61 9.53,14.61 8.26,14.61 6.99,14.61 5.71,14.61 10.79,15.88 9.53,15.88 8.26,15.88 6.99,15.88 5.71,15.88 4.45,15.88 3.17,15.88 1.91,15.88 10.79,17.14 9.53,17.14 8.26,17.14 6.99,17.14 5.71,17.14 5.71,22.86 6.99,22.86 8.26,22.86 9.53,22.86 12.06,22.86 5.71,8.89 6.99,8.89 13.34,25.4 17.14,24.13 18.41,25.4 48.26,10.16 50.8,17.78 46.35,19.05 1.91,25.4 78.11,25.4 79.38,25.4 78.11,6.35 79.38,6.35 84.45,25.4 84.45,6.35 78.11,24.13 79.38,24.13 80.64,24.13 78.11,7.62 79.38,7.62 80.64,7.62 80.64,15.88 78.11,15.88 78.11,8.89 78.11,10.16 79.38,10.16 79.38,8.89 80.64,10.16 79.38,22.86 79.38,21.59 80.64,21.59 78.11,22.86 78.11,21.59 78.11,19.05 78.11,12.7 80.64,19.05 80.64,17.78 80.64,12.7 79.38,15.24 79.38,16.51 64.14,14.61 58.42,17.78 59.69,17.78 60.96,17.78 60.96,16.51 59.69,16.51 58.42,16.51 59.69,19.05 60.96,19.05 59.69,11.43 60.96,11.43 61.98,11.43 63.88,17.4 64.14,20.32 64.14,22.86 53.34,15.24 53.34,13.34 50.8,12.06 48.26,11.43 52.07,15.24 50.8,15.24 49.53,15.24 48.9,14.61 50.8,16.51 52.07,16.51 52.07,17.78 49.53,20.32 50.8,24.13 49.53,24.13 49.53,22.86 49.53,21.59 50.8,22.86 52.07,22.86 53.34,22.86 53.34,21.59 52.07,21.72 50.8,21.72 61.98,19.05 61.98,17.78 61.98,16.51 63.75,11.43
  pour Top (isolate 0.254): 0.64,26.04 85.09,26.04 85.09,5.71 0.64,5.71
  pour Bottom (isolate 0.254, no thermals): 0.64,50.16 0.64,0.64 85.09,0.64 85.09,50.16
IF1
  Top 0.635: J2.SIG 5.08,20.32 5.97,21.21 T1.6
IF2
  Top 0.635: J3.SIG 5.08,11.43 5.97,12.32 T2.6
LOCK0  (via drill 0.25)
  Top 0.127: U8.20 35.19,35.67 34.29,36.58 v34.29,36.83 33.88,36.83 E$47.A | v34.29,46.61 34.04,46.35 17.14,46.35 12.57,41.78 v12.32,41.78 | U9.28 12.15,34.29 v12.06,34.21
  Bottom 0.127: v34.29,46.61 v34.29,36.83 | v12.32,41.78 11.68,41.15 11.68,40.26 12.19,39.75 12.19,34.33 v12.06,34.21
LOCK1  (via drill 0.25)
  Top 0.127: v61.59,46.23 61.34,45.97 17.4,45.97 12.32,40.89 v12.32,40.64 | U7.20 62.5,35.67 61.59,36.58 v61.59,36.83 61.18,36.83 E$48.A | v12.06,31.75 12.11,31.79 U9.33
  Bottom 0.127: v61.59,46.23 v61.59,36.83 | v12.32,40.64 12.59,40.37 12.59,32.27 v12.06,31.75
PDI  (via drill 0.25)
  Top 0.127: U9.34 13.53,30.48 v12.06,30.48
  Bottom 0.127: PDI.1 9.53,45.09 12.06,45.09 12.95,44.2 12.95,30.86 12.57,30.48 v12.06,30.48
PPS
  Top 0.127: U9.4 24.4,33.29 REF.3
RF1
  Top 0.254: C161.2 79.38,20.32 | 79.38,20.32 J6.SIG | L8.1 79.38,20.32
RF2
  Top 0.254: C128.2 79.38,11.43 | 79.38,11.43 J5.SIG | L11.2 79.38,11.43
S$1
  Top 0.254: J1.D- 9.48,35.73 9.92,35.29 U9.26
S$2
  Top 0.254: J1.D+ 9.48,34.92 9.62,34.79 U9.27
S$3
  Top 0.127: U1.2 73.64,14.62 75.56,12.7 C2.1
S$4
  Top 0.127: U1.7 73.64,17.12 75.56,19.05 C1.2
S$5
  Top 0.127: C14.2 68.72,8.89 C13.1
S$6
  Top 0.127: C13.2 68.44,10.16 C11.2 68.47,11.45 U1.27
S$7
  Top 0.127: C7.1 C6.2 | U1.11 69.97,18.78 70.48,19.3 70.48,21.09 C6.2 | C6.2 70.48,22.09 70.48,23.63 C21.2
S$8
  Top 0.127: 71.12,20.32 C8.1 73.03,20.82 73.03,22.23 72.39,22.86 C20.2 | 71.12,20.32 C5.2 | U1.10 70.47,18.65 71.12,19.3 71.12,20.32
S$9
  Top 0.127: U1.30 69.97,12.97 70.48,12.45 70.48,10.66 C4.2 | C4.2 C10.1 | C4.2 70.98,10.03 70.48,9.53 70.48,8.12 C15.1
S$10
  Top 0.127: 72.39,11.43 C3.2 70.98,12.58 70.47,13.1 U1.31 | 72.39,11.43 C9.1 | C14.1 72.39,8.89 73.03,9.53 73.03,10.79 72.39,11.43
S$11
  Top 0.127: C12.2 67.44,10.16 C11.1 67.97,11.95 U1.26
S$12
  Top 0.127: C15.2 67.94,7.62 67.31,8.26 C12.1
S$13
  Top 0.127: C20.1 68.72,22.86 C24.2
S$14
  Top 0.127: C21.1 67.94,24.13 67.31,23.5 C23.2
S$15
  Top 0.127: U1.15 67.97,19.8 C22.1 67.44,21.59 C23.1
S$16
  Top 0.127: U1.14 68.47,20.3 C22.2 68.44,21.59 C24.1
S$17
  Top 0.127: 60.83,21.09 C30.1 L14.1 62.37,20.18 65.27,17.29 66.26,17.29 66.42,17.12 U1.18 66.57,17.12
S$18
  Top 0.127: U3.3 C38.1
S$19
  Top 0.127: C79.2 C77.2
  Top 0.203: U7.4 65.02,30.09 64.14,29.21 C77.2
S$21
  Top 0.127: C40.2 L13.1 62.37,13.2 62.87,12.7 64.14,12.7 65.56,14.12 U1.24
S$22
  Top 0.127: 60.83,14.47 C38.2 L12.1 62.37,14.74 62.87,15.24 64.77,15.24 65.55,14.46 66.26,14.46 66.42,14.62 U1.23
S$25
  Top 0.127: C33.1 L15.1 62.87,21.73 62.87,20.32 65.56,17.62 U1.17
S$26
  Top 0.127: C78.2 C80.2
  Top 0.203: U7.5 65.52,29.19 C78.2
S$27
  Top 0.254: U9.11 20.28,36.79 23,39.51 R1.2
S$28
  Top 0.254: U9.10 20.41,36.29 22.23,38.1 R2.2
S$29
  Top 0.127: C47.2 L4.1 48.76,13.34 L6.2
S$30
  Top 0.127: C46.1 L3.1 C45.2
S$31
  Top 0.127: U4.2 46.47,14.62 C47.1
S$32
  Top 0.127: U4.7 44.28,17.14 C46.2
S$33
  Top 0.127: C52.1 C51.2 | U4.11 42.66,18.78 43.18,19.3 43.18,21.09 C51.2 | C51.2 43.18,22.09 43.18,23.63 C66.2
S$34
  Top 0.127: 43.81,20.32 C53.1 45.72,20.82 45.72,22.23 45.09,22.86 C65.2 | 43.81,20.32 C50.2 | U4.10 43.16,18.65 43.81,19.3 43.81,20.32
S$35
  Top 0.127: U4.30 42.66,12.97 43.18,12.45 43.18,10.66 C49.2 | C49.2 C55.1 | C49.2 43.68,10.03 43.18,9.53 43.18,8.12 C60.1
S$36
  Top 0.127: 45.09,11.43 C48.2 43.68,12.58 43.16,13.1 U4.31 | 45.09,11.43 C54.1 | C59.1 45.09,8.89 45.72,9.53 45.72,10.79 45.09,11.43
S$37
  Top 0.127: C59.2 41.41,8.89 C58.1
S$38
  Top 0.127: C58.2 41.14,10.16 C56.2 41.16,11.45 U4.27
S$39
  Top 0.127: C57.2 40.14,10.16 C56.1 40.66,11.95 U4.26
S$40
  Top 0.127: C60.2 40.64,7.62 40.01,8.26 C57.1
S$41
  Top 0.127: C65.1 41.41,22.86 C69.2
S$42
  Top 0.127: C66.1 40.64,24.13 40.01,23.5 C68.2
S$43
  Top 0.127: U4.15 40.66,19.8 C67.1 40.14,21.59 C68.1
S$44
  Top 0.127: U4.14 41.16,20.3 C67.2 41.14,21.59 C69.1
S$45
  Top 0.127: 34.92,20.32 C98.1 33.52,21.59 C102.1 C101.1 | U4.17 37.62,17.62 34.92,20.32 | R5.2 34.92,20.32
S$46
  Top 0.127: U4.18 39.26,17.12 39.12,17.27 37.47,17.27 35.69,19.05 34.92,19.05 | 34.92,19.05 C94.1 33.52,17.78 C96.2 C95.2 | R5.1 34.92,19.05
S$47
  Top 0.127: 34.92,11.43 C108.1 33.52,10.16 C110.2 C109.2 | U4.24 37.62,14.12 34.92,11.43 | R6.1 34.92,11.43
S$48
  Top 0.127: U4.23 39.14,14.62 38.99,14.48 37.47,14.48 35.69,12.7 34.92,12.7 | 34.92,12.7 C112.1 33.52,13.97 C116.1 C115.1 | R6.2 34.92,12.7
S$50
  Top 0.127: E$5.6 51.6,13.94 C127.1
S$51
  Top 0.127: E$13.6 21.4,20.64 C73.2
S$52
  Top 0.127: L7.1 52.57,19.82 | C44.1 L7.1 | U2.7 52.84,19.68 L7.1
S$53
  Top 0.127: U3.7 52.84,12.06 L5.1 52.7,13.84 C127.2
S$54  (via drill 0.25)
  Top 0.127: U1.20 66.42,16.12 v65.91,16.64 | C78.1 v65.41,27.94
  Bottom 0.127: v65.91,16.64 65.41,17.14 v65.41,27.94
S$55  (via drill 0.25)
  Top 0.127: U1.21 66.14,15.62 66.13,15.63 65.9,15.63 v64.9,16.64 | C77.1 v64.14,27.94
  Bottom 0.127: v64.9,16.64 64.9,22.99 64.14,23.75 v64.14,27.94
S$56
  Top 0.127: E$6.3 51.28,20.97 C44.2
S$57
  Top 0.203: U8.10 40.26,35.17 40.64,35.56 C133.2 41.41,35.7 41.91,36.2 43.43,36.2 43.95,35.68 C137.2
S$58  (via drill 0.25)
  Top 0.127: U4.20 39.12,16.12 v38.61,16.64 | C84.1 v38.1,27.94
  Bottom 0.127: v38.1,27.94 38.1,17.14 v38.61,16.64
S$59  (via drill 0.25)
  Top 0.127: U4.21 38.83,15.62 38.82,15.63 38.59,15.63 v37.59,16.64 | C83.1 v36.83,27.94
  Bottom 0.127: v36.83,27.94 36.83,17.4 v37.59,16.64
S$60
  Top 0.127: C85.2 C83.2
  Top 0.203: U8.4 37.72,30.09 36.83,29.21 C83.2
S$61
  Top 0.127: C84.2 C86.2
  Top 0.203: U8.5 38.22,29.19 C84.2
S$62
  Top 0.127: E$13.5 20.64,20 21.73,18.91 C74.2
S$63
  Top 0.127: E$9.3 22.74,20.3 C73.1
S$64
  Top 0.127: E$10.3 22.38,17.77 C74.1
S$65
  Top 0.127: E$11.3 22.74,12.69 C89.1
S$66
  Top 0.127: E$12.3 22.38,10.14 C90.1
S$67
  Top 0.127: E$14.6 20.78,11.76 C89.2
S$68
  Top 0.127: E$14.5 22.04,11.11 C90.2
S$69
  Top 0.127: U9.2 20.29,32.29 20.57,32 20.57,31.37 19.81,30.61 19.81,24.26 19.43,23.87 E$13.10
S$70
  Top 0.127: C93.1 C94.2
S$71
  Top 0.127: C104.1 C93.2 29.98,17.78 C91.2 C92.2
S$72
  Top 0.127: E$9.6 26.66,21.61 27.44,20.82 C103.2
S$73
  Top 0.127: C97.1 C98.2
S$74
  Top 0.127: C103.1 C97.2 29.98,21.59 C99.1 C100.1
S$75
  Top 0.127: C104.2 E$10.6
S$76
  Top 0.127: C107.1 C108.2
S$77
  Top 0.127: C118.1 C107.2 29.98,10.16 C105.2 C106.2
S$78
  Top 0.127: E$11.6 26.66,13.98 27.44,13.2 C117.2
S$79
  Top 0.127: C111.1 C112.2
S$80
  Top 0.127: C117.1 C111.2 29.98,13.97 C113.1 C114.1
S$81
  Top 0.127: E$12.6 27.43,11.45 C118.2
S$82
  Top 0.127: E$13.9 20.05,22.59 20.19,22.73 20.19,30.35 20.95,31.11 20.95,32.38 20.55,32.79 U9.3
S$83
  Top 0.127: E$14.10 18.66,14.36 18.41,14.61 18.41,23.5 19.43,24.51 19.43,30.86 19.84,31.27 U9.1
S$84
  Top 0.127: E$14.9 18.55,13.71 18.03,14.22 18.03,23.75 19.01,24.73 U9.44
S$85
  Top 0.127: E$14.12 14.59,13.71 14.99,14.1 14.99,23.11 18.51,26.64 U9.43
S$86
  Top 0.127: E$14.11 14.36,14.36 14.61,14.61 14.61,23.5 18.01,26.9 U9.42
S$89
  Top 0.203: U8.9 40.26,34.67 40.64,34.29 C134.2 41.41,34.16 41.91,33.66 43.43,33.66 43.95,34.17 C138.2
S$90
  Top 0.203: U8.12 39.98,36.17 40.64,36.83 C136.2
S$91
  Top 0.203: U8.7 39.98,33.67 40.64,33.02 C135.2 41.41,32.88 42.41,31.89 C142.1
S$92  (via drill 0.25)
  Top 0.203: U8.24 34.17,33.67 C143.1 C144.1 34.29,32.38 34.92,31.75 v34.92,31.11 | C142.2 41.27,31.61 v41.27,31.11
  Bottom 0.203: v41.27,31.11 v34.92,31.11
S$93
  Top 0.203: C144.2 33.16,32.25 34.16,31.25 C145.1
S$94
  Top 0.203: U8.13 38.72,37.19 38.99,37.47 40.01,37.47 40.64,38.1 C147.2
S$95
  Top 0.203: U8.14 38.22,39.8 E$36.1
S$96
  Top 0.127: E$5.3 49.16,11.41 48.9,11.68 L6.1
S$97
  Top 0.127: E$6.6 48.91,19.67 50.03,18.55 C45.1
S$98
  Top 0.203: U7.10 67.56,35.17 67.94,35.56 C146.2 68.72,35.7 69.22,36.2 70.74,36.2 71.25,35.68 C151.2
S$99
  Top 0.203: U7.9 67.56,34.67 67.94,34.29 C148.2 68.72,34.16 69.22,33.66 70.74,33.66 71.25,34.17 C152.2
S$100
  Top 0.203: U7.12 67.29,36.17 67.94,36.83 C150.2
S$101
  Top 0.203: U7.7 67.29,33.67 67.94,33.02 C149.2 68.72,32.88 69.72,31.89 C156.1
S$102  (via drill 0.25)
  Top 0.203: U7.24 61.48,33.67 C157.1 C158.1 61.59,32.38 62.23,31.75 v62.23,31.11 | C156.2 68.58,31.61 v68.58,31.11
  Bottom 0.203: v68.58,31.11 v62.23,31.11
S$103
  Top 0.203: C158.2 60.46,32.25 61.46,31.25 C159.1
S$104
  Top 0.203: U7.13 66.02,37.19 66.29,37.47 67.31,37.47 67.94,38.1 C160.2
S$105
  Top 0.203: U7.14 65.52,39.8 E$37.1
S$106
  Top 0.508: D1.A R1.1
S$107
  Top 0.127: E$47.C 31.84,39.78 C26.1
S$108
  Top 0.127: E$48.C 59.14,39.78 C27.1
S$109
  Top 0.508: D2.A R2.1
S$110
  Top 0.127: U9.40 17.01,29.98 17.14,29.84 17.14,27.3 15.24,25.4 14.61,25.4 12.7,23.5 12.7,22.86 12.96,22.59 E$13.12
S$111
  Top 0.203: E$13.16 11.61,20 R3.2
  Top 0.254: T1.3 10.66,19.05 R3.2
S$112
  Top 0.203: E$13.15 11.61,20.64 R3.1
  Top 0.254: T1.1 10.66,21.59 R3.1
S$113
  Top 0.203: E$14.15 11.61,11.76 R4.1
  Top 0.254: T2.1 10.66,12.7 R4.1
S$114
  Top 0.203: E$14.16 11.61,11.11 R4.2
  Top 0.254: T2.3 10.66,10.16 R4.2
S$115
  Top 0.127: E$13.11 13.72,23.25 17.51,27.04 U9.41
S$116
  Top 0.254: L1.1 76.83,20.32 | 76.83,20.32 75.7,20.32 C1.1 | C161.1 76.83,20.32
S$117
  Top 0.254: L2.1 76.83,11.43 | C2.2 75.7,11.43 76.83,11.43 | C128.1 76.83,11.43
S$121
  Top 0.127: U3.2 C40.1
S$122
  Top 0.127: U2.2 C30.2
S$123
  Top 0.127: U2.3 C33.2
SPI_CLK  (via drill 0.25)
  Top 0.127: U8.17 36.72,38.22 v36.2,38.73 | v48.64,17.14 48.9,16.89 48.9,16.13 48.39,15.62 U4.4 | v48.26,40.01 48.26,39.12 48.13,38.99 48.13,28.7 v48.26,28.57 | U1.4 75.31,15.62 v75.56,15.88 | v75.56,40.89 75.31,40.89 73.03,43.18 v63.5,43.18 v48.26,43.18 v36.2,43.18 35.94,42.93 20.7,42.93 16.51,38.73 U9.17 | v75.56,39.12 75.82,38.86 75.82,28.83 v75.56,28.57 | U7.17 64.02,38.22 v63.5,38.73
  Bottom 0.127: v36.2,38.73 v36.2,43.18 | v48.26,28.57 48.26,27.69 47.75,27.18 47.75,17.78 48.39,17.14 v48.64,17.14 | v48.26,43.18 v48.26,40.01 | v75.56,28.57 75.56,27.69 75.31,27.43 75.31,17.02 75.56,16.76 v75.56,15.88 | v75.56,40.89 v75.56,39.12 | v63.5,38.73 v63.5,43.18
SPI_SDI  (via drill 0.25)
  Top 0.127: U8.18 36.22,37.45 v35.56,38.1 | U4.5 44.71,16.12 44.95,15.88 47.76,15.88 v48.26,16.38 | v47.62,39.37 47.75,39.24 47.75,29.08 47.62,28.96 v47.62,27.94 | U1.5 74.55,16.12 v74.93,16.51 | v74.93,27.94 74.93,28.83 75.44,29.34 75.44,38.35 74.93,38.86 74.93,40.01 73.03,41.91 v62.87,41.91 v47.62,41.91 v35.56,41.91 35.31,42.16 21.21,42.16 17.51,38.47 U9.15 | U7.18 63.52,37.45 v62.87,38.1
  Bottom 0.127: v35.56,38.1 v35.56,41.91 | v48.26,16.38 47.37,17.27 47.37,27.69 v47.62,27.94 | v47.62,41.91 v47.62,39.37 | v74.93,16.51 v74.93,27.94 | v62.87,38.1 v62.87,41.91
SPI_SDO  (via drill 0.25)
  Top 0.127: U4.6 45.6,16.62 v45.72,16.51 | v46.99,40.01 46.99,39.12 47.37,38.73 47.37,29.21 46.99,28.83 v46.99,28.57 | U1.6 74.16,16.62 74.68,17.14 75.18,17.14 75.82,16.51 v76.2,16.51 | v76.2,27.94 76.2,39.37 73.03,42.55 v46.99,42.55 20.95,42.55 17.01,38.6 U9.16
  Bottom 0.127: v46.99,28.57 46.99,17.14 46.35,16.51 v45.72,16.51 | v46.99,42.55 v46.99,40.01 | v76.2,16.51 76.2,16.64 75.69,17.14 75.69,27.3 76.2,27.81 v76.2,27.94
V2.5_1  (via drill 0.25)
  Top 0.254: E$9.1 v23.5,21.59 | E$10.1 v23.5,19.05 | E$11.1 23.95,13.97 v23.5,13.97 | E$12.1 23.95,11.43 v23.5,11.43
  Top 0.635: v24.13,3.81 24.13,4.12 E$24.1
  Bottom 0.254: v23.5,21.59 v23.5,19.05 v23.5,13.97 v23.5,11.43 23.5,3.48 E$19.3
  Bottom 0.508: C123.2 v23.5,21.59 | C124.2 v23.5,19.05 | C125.2 v23.5,13.97 | C126.2 v23.5,11.43
  Bottom 0.635: E$19.3 23.72,3.4 v24.13,3.81
V2.5_2  (via drill 0.25)
  Top 0.254: E$5.1 50,13.17 v50.16,13.34 | E$6.1 50.33,19.52 v50.8,19.05
  Top 0.635: v49.53,3.81 49.53,4.12 E$8.1
  Bottom 0.254: E$7.3 48.9,3.48 48.9,12.06 v50.16,13.34 50.16,18.41 v50.8,19.05
  Bottom 0.508: L10.2 v50.16,13.34 | L9.2 v50.8,19.05
  Bottom 0.635: E$7.3 49.12,3.4 v49.53,3.81
V3.3  (via drill 0.25)
  Top 0.203: U8.2 36.72,31.77 C140.1 | U8.6 38.72,31.91 C139.2 | U8.21 34.41,35.17 C141.1 34.91,34.17 U8.23 | U7.2 64.02,31.77 C154.1 | U7.6 66.02,31.91 C153.2 | U7.21 61.71,35.17 C155.1 62.21,34.17 U7.23
  Top 0.254: U9.31 11.53,32.79 C72.1 | U9.19 15.51,39.14 C71.1 | U9.39 C76.1 | U9.9 21.5,35.79 C75.1 | U9.14 18.01,38.2 v18.41,38.61
  Bottom 0.635: E$43.3 52.07,28.25 v52.07,28.57 | v17.14,40.64 18.41,39.37 18.41,38.73 | 18.41,38.73 v18.41,38.61 | v19.68,38.73 18.41,38.73
  pour Top (isolate 0.254): 0.64,26.67 85.09,26.67 85.09,50.16 0.64,50.16
V3.3_1  (via drill 0.25)
  Top 0.203: U4.28 41.66,12.95 v41.91,12.7 42.16,12.95 U4.29 | U4.13 41.66,18.8 v41.91,19.05 42.16,18.8 U4.12 | U4.22 38.62,15.12 v38.61,15.11
  Top 0.254: C102.2 C122.2 v34.92,23.5 | C96.1 C119.1 v34.92,15.88 C120.2 C116.2 | C110.1 C121.1 v34.92,8.26
  Top 0.508: C51.1 42.68,21.09 v42.55,20.95 42.68,20.82 C50.1 | C48.1 42.68,10.93 v42.55,10.79 42.68,10.66 C49.1
  Top 0.635: E$23.1 35.24,4.13 v35.56,3.81
  Bottom 0.254: v38.61,15.11 38.73,15.24 41.27,15.24 | v41.91,12.7 41.27,13.34 41.27,15.24 | v41.91,19.05 41.27,18.41 41.27,15.24 | v34.92,15.88 34.92,16.51 | E$20.3 34.92,3.48
  Bottom 0.508: C61.1 v41.91,12.7 41.91,10.93 C62.1 v42.55,10.79 | C64.1 v42.55,20.95 42.55,19.18 C63.1 v41.91,19.05 | v38.61,15.11 C70.1 37.84,15.38 36.7,16.51 34.92,16.51 34.92,17.14 34.16,17.91 34.16,21.46 34.92,22.23 v34.92,23.5 | v34.92,15.88 34.92,14.61 34.16,13.84 34.16,10.29 34.92,9.53 v34.92,8.26 34.92,3.48
  Bottom 0.635: v35.56,3.81 35.15,3.4 E$20.3
V3.3_2  (via drill 0.25)
  Top 0.203: U1.12 69.47,18.8 v69.22,19.05 68.97,18.8 U1.13 | U1.29 69.47,12.95 v69.22,12.7 68.97,12.95 U1.28 | U1.22 65.92,15.12 v65.91,15.11
  Top 0.508: C4.1 69.98,10.66 v69.85,10.79 69.98,10.93 C3.1 | C5.1 69.98,20.82 v69.85,20.95 69.98,21.09 C6.1 | L15.2 63.37,21.73 v63.5,21.59 63.37,21.45 L14.2 | L12.2 63.37,14.11 v63.5,13.97 63.37,13.84 L13.2
  Top 0.635: E$27.1 63.5,4.12 v63.5,3.81
  Bottom 0.254: 68.58,15.24 68.58,13.34 | 68.58,15.24 68.58,18.41 | 68.58,15.24 66.04,15.24 v65.91,15.11 | 62.87,21.59 v63.5,21.59 | v63.5,13.97 62.87,13.97 | C42.1 62.87,13.84 | 62.87,3.81 63.18,3.49
  Bottom 0.508: C19.1 v69.85,20.95 69.85,19.18 C18.1 v69.22,19.05 68.58,18.41 | v69.85,10.79 C17.1 69.22,10.93 v69.22,12.7 | C16.1 v69.22,12.7 | 68.58,13.34 v69.22,12.7 | v65.91,15.11 C25.1 65.14,15.38 64.01,16.51 62.87,16.51 | C43.1 v63.5,21.59 | 62.87,16.51 62.87,21.59 | 62.87,13.97 62.87,16.51 | C42.1 v63.5,13.97 | 62.87,13.84 62.87,3.81
  Bottom 0.635: v63.5,3.81 63.18,3.49 63.09,3.4 E$26.3
V5  (via drill 0.25, 0.64)
  Top 0.254: E$13.19 13.58,18.03 v12.7,18.03 | v20.32,18.03 20.31,18.05 E$13.2 E$13.1 | E$14.19 12.71,9.15 v12.7,9.14 | v20.32,9.14 E$14.2 E$14.1 | C131.2 11.93,17.78 8.26,17.78 7.62,18.41 7.62,19.68 8.26,20.32 T1.2 | C130.2 11.93,8.89 8.26,8.89 7.62,9.53 7.62,10.79 8.26,11.43 v8.89,11.43 | L8.2 80.01,17.28 80.01,14.61 v79.38,13.97
  Top 0.508: v12.7,18.03 12.31,17.64 C131.2 | v12.7,9.14 12.31,8.76 C130.2 | v20.32,9.14 20.71,8.76 C129.2 | v20.32,18.03 20.71,17.64 C132.2 | T1.2 v8.89,20.32 | T2.2 v8.89,11.43 | C162.2 79.11,14.11 L11.1 v79.38,13.97 | C165.1 79.11,17.64 L8.2 v79.38,17.78
  Top 0.914: E$1.1 v11.43,27.3 E$2.1
  Bottom 0.254: E$43.1 56.92,27.08 56.52,26.67 v56.52,4.45 | v80.01,4.45 80.01,13.34 v79.38,13.97
  Bottom 0.508: v20.32,18.03 19.43,18.03 | v12.7,9.14 14.22,7.62 | C163.1 v8.89,20.32 | C164.1 v8.89,11.43
  Bottom 0.635: E$19.1 28.5,3.25 v28.57,3.17 | E$20.1 39.93,3.25 v40.01,3.17 | E$7.1 53.9,3.25 v53.98,3.17 | E$26.1 67.87,3.25 v67.94,3.17
  Bottom 0.813: v12.7,18.03 19.43,18.03 19.43,9.4 19.68,9.14 v20.32,9.14 18.8,7.62 14.22,7.62 14.61,7.24
  Bottom 1.016: 14.61,7.24 v14.61,4.45 | v12.7,18.03 11.86,18.03 10.79,19.1 10.79,26.67 v11.43,27.3
  other vias: 28.57,3.81 28.57,2.54 40.01,3.81 40.01,2.54 53.98,3.81 53.98,2.54 67.94,3.81 67.94,2.54
  pour Top (isolate 0.254): 0.64,5.08 85.09,5.08 85.09,0.64 0.64,0.64
VBUS  (via drill 0.25)
  Top 0.508: J1.VBUS 9.22,36.52 v9.53,36.83
  Bottom 0.914: E$3.1 9.53,41.59 v9.53,36.83
VIN  (via drill 0.64)
  Top 0.914: v7.62,27.3 E$2.2
  Bottom 0.914: E$4.2 4.76,38.81 3.67,37.71 3.67,32.14 4.76,31.04 4.76,28.89 6.35,27.3 v7.62,27.3
  Bottom 1.016: E$3.2 E$4.2

## Text on the board
tPlace: LO2 | LO1 | IF | RF